# Altium PCB PMOD_RS485.PcbDoc
Units mil, origin at the board's own origin, x right, y up, seen from the top; angles counter-clockwise.
Board outline 1800 x 800 mil, 2 copper layers (Top Layer, Bottom Layer), stack 62.441 mil thick; 21 components, 10 nets, 57 pads, 7 vias.
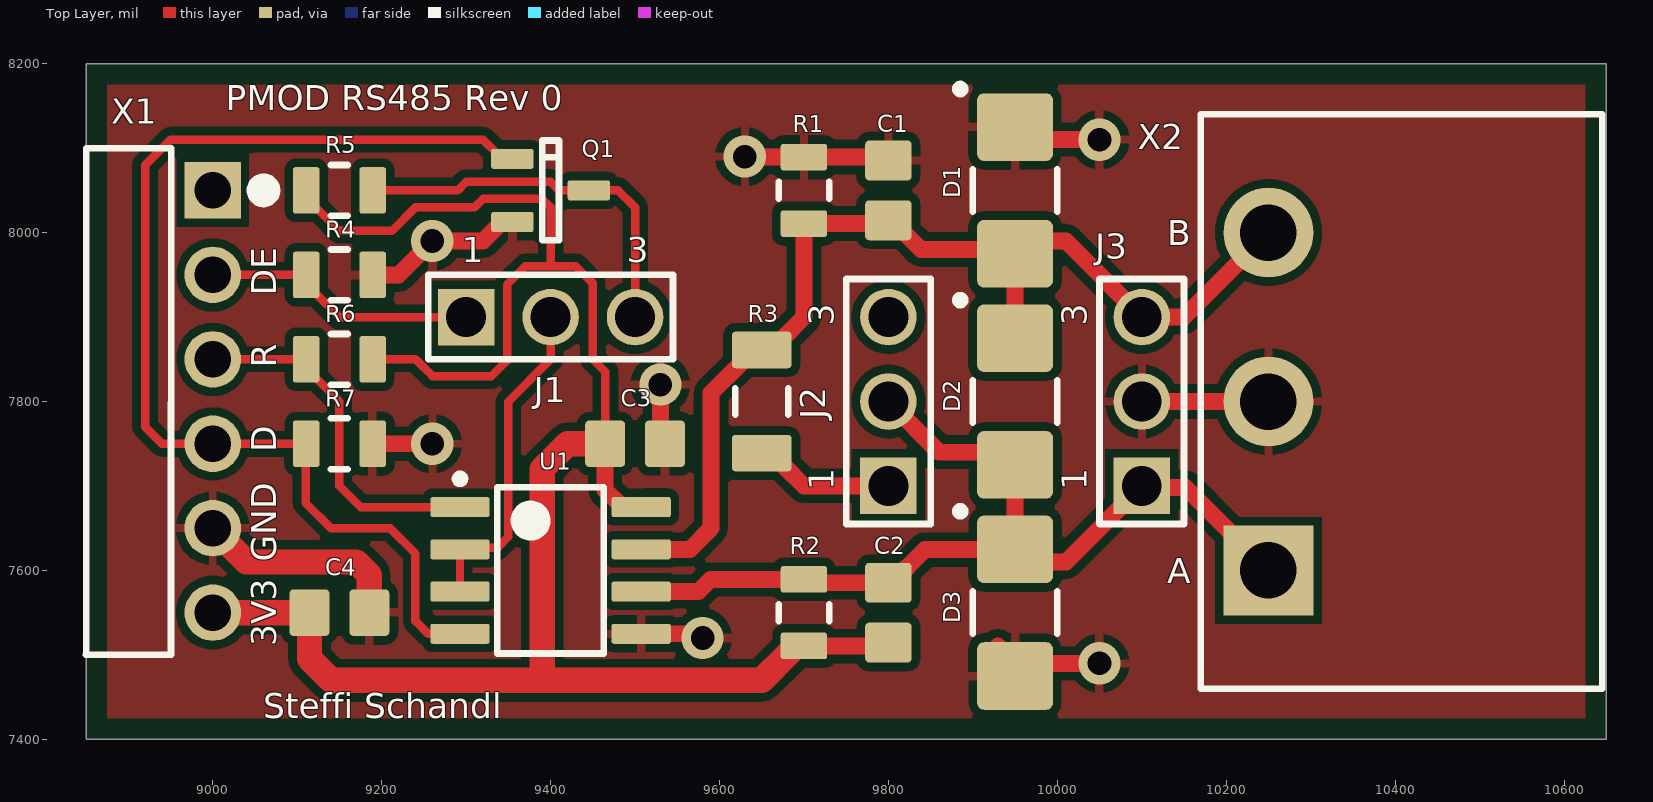
[diagram p0: Top Layer view]
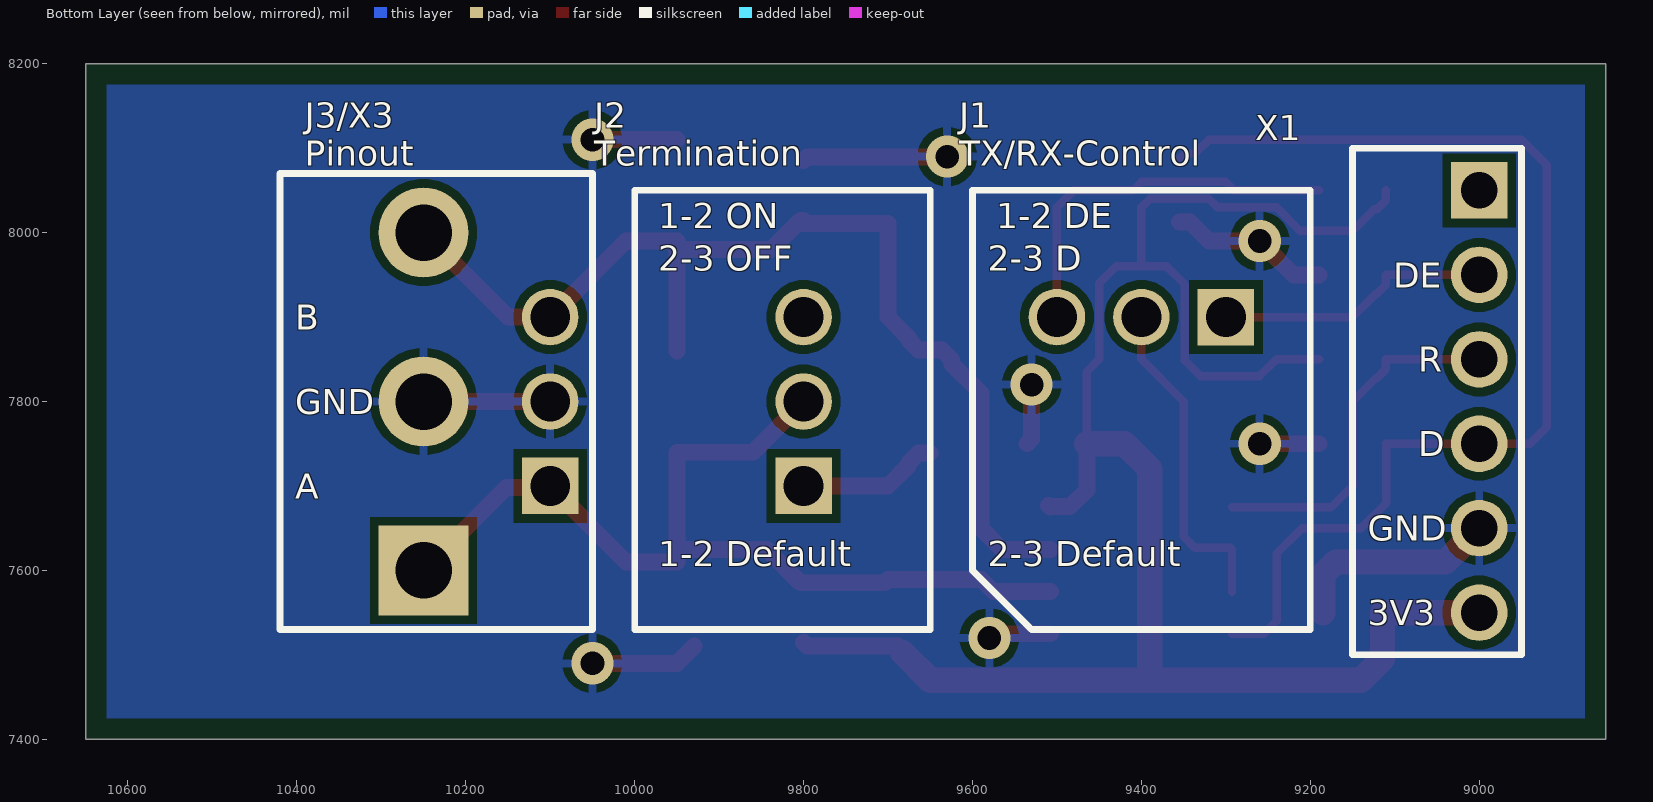
[diagram p1: Bottom Layer view, seen from below]

## Layer stack, top to bottom
Top Solder: solder mask 0.4, Solder Resist, Dk 3.5
Top Layer: signal copper 1.4173
Dielectric 1: dielectric 59.6063, FR-4, Dk 4.8
Bottom Layer: signal copper 1.4173
Bottom Solder: solder mask 0.4, Solder Resist, Dk 3.5

## Board outline
8850,7400 8850,8200 10650,8200 10650,7400

## Design rules (kind name [scope] priority, off if disabled: settings)
Clearance [All] p1: gap=10 ignorepadtopadclearanceinfootprint=FALSE except(0: Arc-Hole Track-Hole SMDPad-Hole THPad-Hole Via-Hole Fill-Hole Poly-Hole Region-Hole Text-Hole)
PolygonConnect [All] p1: connectstyle=Relief reliefconductorwidth=10 reliefentries=4 polygonreliefangle="90 Angle" airgapwidth=10
RoutingVias [All] p1: holewidth=28 width=50 viastyle="Through Hole" minholewidth=28 minwidth=50 maxholewidth=28 maxwidth=50
SilkToSilkClearance [All] p1: silktosilkclearance=2.5
SilkToSolderMaskClearance [IsPad] p1: minsilkscreentomaskgap=2.5 clearancetoexposedcopper=TRUE
SolderMaskExpansion [All] p1: expansion=4 istentingtop=FALSE
Width [All] p1: maxlimit=50 minlimit=10 preferedwidth=20
28 further rules are at their usual default settings.

## Components (designator, comment, footprint, x,y, rotation, side; value= is the part's Value field where it differs from the comment)
C1 "100p" 0805-C 9800,8050 r270 top
C2 "100p" 0805-C 9800,7550 r270 top
C3 "100n" 0805-C 9500,7750 r0 top
C4 "10u" 0805-C 9150,7550 r180 top
D1 "SMAJ12.0CA" SMA-BIDIRECTIONAL 9950,8050 r270 top
D2 "SMAJ6.5CA" SMA-BIDIRECTIONAL 9950,7800 r270 top
D3 "SMAJ12.0CA" SMA-BIDIRECTIONAL 9950,7550 r270 top
J1 "61300311121" WE-61300311121 10850,7900 r0 top
J2 "61300311121" WE-61300311121 9800,9250 r90 top
J3 "61300311121" WE-61300311121 10100,9250 r90 top
Q1 "BSS138" SOT23-3 9400,8050 r270 top
R1 "10K" 0805-R 9700,8050 r270 top
R2 "10K" 0805-R 9700,7550 r270 top
R3 "120R" 1206-R 9650,7800 r270 top
R4 "10K" 0805-R 9150,7950 r0 top
R5 "10K" 0805-R 9150,8050 r180 top
R6 "10K" 0805-R 9150,7850 r180 top
R7 "10K" 0805-R 9150,7750 r180 top
U1 "THVD1429" SOIC-8 9400,7600 r270 top
X1 "61300611021" WE-61302021121 9000,7800 r0 top
X2 "691313510003" WE-691313510003 10250,7800 r90 top

## Footprints (in the part's own frame and the unit in brackets; to place one, negate y for a bottom-side part, rotate by r counter-clockwise, add the part's x,y. Pads: shape width x height; smd on the part's side, far side on the other; paste and mask are expansions set on the pad)
0805-C [mm] "Chip Capacitor, 2-Leads, Body 2,00x1,25mm, IPC Medium Density"
  rrect20% 1.2x1.4 smd: 1(-0.9,0) 2(0.9,0)
  body extent -1.1,-0.72 1.1,0.72, height 1.45
0805-R [mm] "Chip Resistor, 2-Leads, Body 2,00x1,25mm, IPC Medium Density"
  rrect20% 0.8x1.4 smd: 1(-1,0) 2(1,0)
  silkscreen extent -0.25,-0.76 0.25,0.76, body extent -1,-0.62 1,0.63, height 0.5
1206-R [mm] "Chip Resistor, 2-Leads, Body 3,13x1,55mm, IPC Medium Density"
  rrect20% 1.1x1.8 smd: 1(-1.55,0) 2(1.55,0)
  silkscreen extent -0.4,-0.8 0.4,0.8, body extent -1.6,-0.8 1.6,0.8, height 0.6
SMA-BIDIRECTIONAL [mil] "Molded Diode DO-214AC (SMA), 2-Leads, Body 4.25x2.67mm, IPC Medium Density"
  rrect20% 80x90 smd: 1(-75,0) 2(75,0)
  silkscreen extent -125,-70 25,50, body extent -108,-55 108,55, height 102
SOIC-8 [mm] "SOIC, 8-Leads, Body 4,90x3,90mm, Pitch 1,27mm, IPC Medium Density"
  rrect20% 0.6x1.778 smd: 1(-1.905,-2.725) 2(-0.635,-2.725) 3(0.635,-2.725) 4(1.905,-2.725) 5(1.905,2.725) 6(0.635,2.725) 7(-0.635,2.725) 8(-1.905,2.725)
  silkscreen extent -2.88,-2.85 2.5,1.6, body extent -2.5,-3 2.5,3, height 1.75
SOT23-3 [mm] "SOT95P230X110-3N, JEDEC TO-236AB"
  rrect20% 0.6x1.27 smd: 1(-0.95,-1.15) 2(0.95,-1.15) 3(0,1.15)
  silkscreen extent -1.5,-0.25 1.5,0.25, body extent -1.45,-1.4 1.45,1.4, height 1.3
WE-61300311121 [mm] "CONN HEADER VERT 3POS 2.54MM"
  rect 1.7x1.7 hole 1.2: 1(-39.37,0)
  round 1.7 hole 1.2: 2(-36.83,0) 3(-34.29,0)
  silkscreen extent -40.51,-1.27 -33.15,1.27, body extent -40.64,-1.27 -33.02,1.27, height 8.54
WE-61302021121 [mm] "CONN HEADER VERT 20POS 2.54MM"
  rect 1.7x1.7 hole 1.1: 1(0,6.35)
  round 1.7 hole 1.1: 2(0,3.81) 3(0,1.27) 4(0,-1.27) 5(0,-3.81) 6(0,-6.35)
  silkscreen extent -3.82,-7.62 1.78,7.62, body extent -10.06,-7.62 0.3,7.62, height 2.54
WE-691313510003 [mm] "TERM BLOCK HDR 3POS 90DEG 5.08MM"
  rect 2.7x2.7 hole 1.7: 1(-5.08,0)
  round 2.7 hole 1.7: 2(0,0) 3(5.08,0)
  silkscreen extent -8.64,-10.03 8.64,2.03, body extent -8.62,-10.06 8.62,1.94, height 8.64

## Part data
C1 C2: library part "Capacitor 100p 0805", "CAP CER 100PF 250V C0G/NP0 0805", Manufacturer="Murata Electronics", Manufacturer PartNo=GRM21A5C2E101FW01D, Supplier 1 PartNo (Info)=490-GRM21A5C2E101FW01DCT-ND, Supplier 1 (Info)=Digi-Key
C3: library part "Capacitor 100n 0805", "CAP CER 0.1UF 50V X8R 0805", Manufacturer="Murata Electronics", Manufacturer PartNo=GCM21BR91H104KA37L, Supplier 1 PartNo (Info)=490-11165-1-ND, Supplier 1 (Info)=Digi-Key
C4: library part "Capacitor 10u 0805", "CAP CER 10UF 16V X5R 0805", Manufacturer="Taiyo Yuden", Manufacturer PartNo=EMK212BBJ106KGHT, Supplier 1 PartNo (Info)=587-3320-1-ND, Supplier 1 (Info)=Digi-Key
D1 D3: library part "Diode TVS SMAJ12.0CA", "TVS DIODE 12V 19.9V DO214AC", Manufacturer="Micro Commercial Co", Manufacturer PartNo=SMAJ12CA-TP, Supplier 1 PartNo (Info)=SMAJ12CA-TPMSCT-ND, Supplier 1 (Info)=Digi-Key
D2: library part "Diode TVS SMAJ6.5CA", "TVS DIODE 6.5V 11.2V DO214AC", Manufacturer="Micro Commercial Co", Manufacturer PartNo=SMAJ6.5CA-TP, Supplier 1 PartNo (Info)=SMAJ6.5CA-TPMSCT-ND, Supplier 1 (Info)=Digi-Key
J1 J2 J3: library part "WE 61300311121", "CONN HEADER VERT 3POS 2.54MM", Manufacturer="Würth Elektronik", Supplier 1 PartNo (Info)=732-5316-ND, Manufacturer PartNo=61300311121, Supplier 1 (Info)=Digi-Key
Q1: library part "Transistor MOSFET N Channel", "MOSFET N-CH 50V 200MA SOT-23", Manufacturer="ON Semiconductor", Manufacturer PartNo=BSS138LT3G, Supplier 1 PartNo (Info)=BSS138LT3GOSCT-ND, Supplier 1 (Info)=Digi-Key
R1 R2 R4 R5 R6 R7: library part "Resistor 10K 0805", "RES SMD 10K OHM 1% 1/8W 0805", Manufacturer=Yageo, Manufacturer PartNo=RC0805FR-0710KL, Supplier 1 PartNo (Info)=311-10.0KCRCT-ND, Supplier 1 (Info)=Digi-Key
R3: library part "Resistor 120R 1206", "RES SMD 120 OHM 1% 1/4W 1206", Manufacturer=Yageo, Manufacturer PartNo=RC1206FR-07120RL, Supplier 1 PartNo (Info)=311-120FRCT-ND, Supplier 1 (Info)=Digi-Key
U1: library part "THVD1429 SOIC8", "IC TRANSCEIVER HALF 1/1 8SOIC", Manufacturer="Texas Instruments", Manufacturer PartNo=THVD1429DR, Supplier 1 PartNo (Info)=296-THVD1429DRCT-ND, Supplier 1 (Info)=Digi-Key
X1: library part "PMOD Plug 6X1", "CONN HEADER R/A 6POS 2.54MM", Manufacturer="Würth Elektronik", Supplier 1 PartNo (Info)=732-5339-ND, Manufacturer PartNo=61300611021, Supplier 1 (Info)=Digi-Key
X2: library part "WE 691313510003", "TERM BLOCK HDR 3POS 90DEG 5.08MM", Manufacturer="Würth Elektronik", Supplier 1 PartNo (Info)=732-2071-ND, Manufacturer PartNo=691313510003, Supplier 1 (Info)=Digi-Key

## Via types
v1: diameter 50, hole 28, Top Layer to Bottom Layer, 7 vias

## Nets (pads, with @x,y where several pads share a name; then routed paths per layer and width w, separated by ;. In a path a pad name is that pad's centre, name@x,y a point inside that pad or via, vN(x,y) a via of type N, cw(c..) or ccw(c..) an arc to the next point about the centre after c; other vN are vias at no path point)
D: Q1.1 R7.2 U1.4 X1.4 | length 1329.5
  Top Layer w10: U1.4 9255,7525 9240,7540 9240,7620 9210,7650 9140,7650 9110,7680 9110,7749.37 R7.2 X1.4 8940,7750 8920,7770 8920,8080 8950,8110 9320,8110 9336.35,8093.65 9348.47,8093.65 Q1.1
DE: J1.1 R4.1 X1.2 | length 327.6
  Top Layer w10: X1.2 R4.1 9110.63,7938.19 9121.38,7927.44 9122.56,7927.44 9150,7900 J1.1
GND: C1.1 C3.2 C4.1 D1.1 D3.2 J3.2 Q1.2 R1.1 R4.2 R7.1 U1.5 X1.5 X2.2 | length 1213
  Top Layer w20: R7.1 v1(9260,7750) ; R4.2 9220,7950 v1(9260,7990) 9320,7990 9342.6,8012.6 Q1.2 ; U1.5 9575,7525 v1(9580,7520) ; v1(9530,7820) 9530,7755.43 C3.2 ; v1(9630,8090) 9630.63,8089.37 R1.1 9796.06,8089.37 C1.1 ; D3.2@9929.49,7510.63 9950,7490.12 9950,7489.96 v1(10050,7490) v1(10050,7490) ; D1.1@9950,8110.04 v1(10050,8110) v1(10050,8110) ; J3.2 X2.2
  Top Layer w30: X1.5 9040,7610 9170,7610 9185.43,7594.57 C4.1
NetC1_2: C1.2 D1.2 D2.1 J3.3 R1.2 R3.1 U1.7 X2.3 | length 1290.4
  Top Layer w20: U1.7 9565,7625 9590,7650 9590,7810 9624.57,7844.57 9624.57,7849.37 9636.22,7861.02 R3.1 9663.78,7861.02 9675.43,7872.68 9675.43,7875.43 9700,7900 R1.2 C1.2@9800,8010.63 ; C1.2 9803.94,8014.57 9838.5,7980 9945,7980 D1.2 ; D2.1@9950,7860.04 9950,7980 9950,7989.96 10010.04,7989.96 J3.3 10150,7900 X2.3
NetC2_1: C2.1 D2.2 D3.1 J2.2 J3.1 R2.1 U1.6 X2.1 | length 1150.2
  Top Layer w20: U1.6 9575,7575 9589.37,7589.37 R2.1 9703.94,7585.43 9803.94,7585.43 9843.5,7625 D3.1 ; J2.2 9860.04,7739.96 9950,7739.96 D3.1 ; X2.1 10151.75,7698.25 10101.75,7698.25 J3.1 10010.04,7610.04 9950,7610.04 D3.1
NetJ1_2: J1.2 U1.2 U1.3 | length 394.2
  Top Layer w10: U1.3 U1.2 9294.58,7626.86 9336.86,7626.86 9350,7640 9350,7800 9400,7850 J1.2
NetJ1_3: J1.3 Q1.3 R5.1 | length 457.2
  Top Layer w10: R5.1 9290,8050 9300,8060 9400,8060 9410,8050 Q1.3 9480,8050 9500,8030 J1.3
NetJ2_1: J2.1 R3.2 | length 167.8
  Top Layer w20: R3.2 9663.78,7738.98 9675.43,7727.32 9675.43,7724.57 9700,7700 J2.1
R: R6.2 U1.1 X1.3 | length 430.7
  Top Layer w10: X1.3 R6.2 9110.63,7838.19 9121.38,7827.44 9122.6,7827.44 9150,7800.04 9150,7700 9175,7675 U1.1
VCC: C2.2 C3.1 C4.2 R2.2 R5.2 R6.1 U1.8 X1.6 | length 2317
  Top Layer w10: R5.2 9110.63,8038.19 9121.38,8027.44 9124.56,8027.44 9150,8002 9212,8002 9240,8030 9310,8030 9320,8040 9390,8040 9400,8030 9400,7960 ; R6.1 9240,7850 9260,7830 9330,7830 9348.46,7848.46 9348.46,7938.46 9370,7960 9400,7960 ; C3.1 9464.57,7835.43 9450,7850 9450,7940 9430,7960 9400,7960
  Top Layer w20: C3.1 9464.57,7695.43 9484.31,7675.69 9506.59,7675.69 U1.8 9508.33,7675 U1.8@9510,7676.67 ; R2.2@9682.44,7502.44 9682.44,7504.88 9688.19,7510.63 R2.2 9796.06,7510.63 C2.2
  Top Layer w30: X1.6 C4.2 9114.57,7495.43 9140,7470 9390,7470 ; C3.1 9420,7750 9390,7720 9390,7470 ; R2.2@9682.44,7502.44 9650,7470 9390,7470
pads on no net: J2.3 X1.1

## Polygon pours and split planes (outlines as drawn)
GND on Bottom Layer "GND_L02_P-001" (solid, pour order 0): 8875,8175 10625,8175 10625,7425 8875,7425
GND on Top Layer "GND_L02_P-001" (solid, pour order 1): 8875,8175 10625,8175 10625,7425 8875,7425

## Silkscreen, mask and mechanical layers (free items; w line width, h text height)
Top Overlay:
  text "PMOD RS485 Rev 0" at 9015.08,8145 h30
  text "B" at 10130,7985 h30
  text "DE" at 9075,7925.01 h30 r90
  text "R" at 9075,7840 h30 r90
  text "D" at 9075,7740 h30 r90
  text "GND" at 9075,7610.01 h30 r90
  text "A" at 10130,7585 h30
  text "3V3" at 9075,7510.01 h30 r90
  text "Steffi Schandl" at 9060.06,7425 h30
Bottom Overlay:
  lines w7.87: 8950,7500 8950,8100 9150,8100 9150,7500 8950,7500 ; 9200,7530 9530,7530 9600,7600 9600,8050 9200,8050 9200,7530 ; 9650,7530 10000,7530 10000,8050 9650,8050 9650,7530 ; 10050,7530 10050,8070 10420,8070 10420,7530 10050,7530
  text "X1" at 9265.43,8109.41 h30
  text "J1 / TX/RX-Control" at 9615.43,8079.41 h30
  text "J2 / Termination" at 10047.93,8079.41 h30
  text "J3/X3 / Pinout" at 10390.45,8079.41 h30
  text "1-2 DE" at 9572,8005 h30
  text "1-2 ON" at 9972,8005 h30
  text "2-3 D" at 9582,7955 h30
  text "2-3 OFF" at 9972,7955 h30
  text "DE" at 9102,7935 h30
  text "B" at 10402,7885 h30
  text "R" at 9072,7835 h30
  text "GND" at 10402,7785 h30
  text "D" at 9072,7735 h30
  text "A" at 10402,7685 h30
  text "GND" at 9132,7635 h30
  text "2-3 Default" at 9582,7605 h30
  text "1-2 Default" at 9972,7605 h30
  text "3V3" at 9132,7535 h30
Board Shape:
  the board outline again, w10
A4 Sheet:
  lines w10: 4000,4000 15500,4000 15500,11603.94 4000,11603.94 4000,4000
Top A4 ISO Block:
  lines w10: 4000,5900 4200,5900 ; 4000,7800 4200,7800 ; 4000,9700 4200,9700 ; 4200,4500 9100,4500 ; 6875,4000 6875,4200 ; 6875,11400 6875,11600 ; 9100,4200 9100,5700 ; 9750,4000 9750,4200 ; 9750,11400 9750,11600 ; 10700,4200 10700,5700 ; 10700,4500 11700,4500 15300,4500 ; 10700,4800 15300,4800 ; 10700,5100 15300,5100 ; 10700,5400 11700,5400 ; 11700,4200 11700,5700 ; 12625,4000 12625,4200 ; 12625,11400 12625,11600 ; 13100,4500 13100,4800 ; 14500,4200 14500,4800 ; 14900,4200 14900,4800 ; 15300,5700 9100,5700 ; 15300,5900 15500,5900 ; 15300,7800 15500,7800 ; 15300,9700 15500,9700 ; 9100,5700 9100,5700 ; 4000,4000 15500,4000 15500,11600 4000,11600 4000,4000 ; 4200,4200 15300,4200 15300,11400 4200,11400 4200,4200
  text "3" at 11166.16,11431.4 h140
  text "1" at 5423.5,11430 h140
  text "2" at 8282.37,11430 h140
  text "4" at 14031.61,11430 h140
  text "A" at 4055.58,10580 h140
  text "A" at 15355.58,10580 h140
  text "B" at 4062.4,8680 h140
  text "B" at 15362.4,8680 h140
  text "C" at 4062.4,6781.87 h140
  text "C" at 15362.4,6781.87 h140
  text "Projekt" at 11725,5601.23 h110
  text "Gezeichnet von" at 10725,5591.25 h110
  text ".P_PcbDrawnBy" at 10800,5450.88 h160
  text "am" at 10725,5302.6 h110
  text ".P_ProjectName" at 11800,5291.25 h280
  text ".P_PcbDrawn" at 10800,5152.15 h160
  text "Freigegeben" at 10725,5001.23 h110
  text "Titel" at 11725,4991.2 h110
  text "D" at 4057.85,4880 h140
  text "D" at 15357.85,4880 h140
  text ".Layer_Name" at 11800,4865.28 h160
  text ".P_PcbCheckedBy" at 10800,4850.88 h160
  text "ibs" at 9273.46,4841.61 h1120
  text "am" at 10725,4702.6 h110
  text "Nummer" at 11725,4692.8 h110
  text "Variante" at 13125,4691.25 h110
  text "Revision" at 14525,4691.2 h110
  text "Größe" at 14925,4691.25 h110
  text ".P_PcbChecked" at 10800,4552.15 h160
  text ".P_PcbIndex" at 14600,4551.95 h160
  text ".VariationNane" at 11800,4550.88 h160
  text ".VariationNane" at 13200,4550.88 h160
  text "A4" at 15000,4551.08 h160
  text "Status" at 10725,4392.12 h110
  text "Datei" at 11725,4391.2 h110
  text "Blatt" at 14525,4390.97 h110
  text "Blätter" at 14925,4391.2 h110
  text "IBS-Systemtechnik / Wettersteinstrasse 14 / D-82481 Mittenwald" at 9298.46,4329.8 h140
  text ".DocumentName" at 11800,4253.15 h160
  text "1" at 14600,4251.15 h160
  text "1" at 15000,4251.15 h160
  text "Weitergabe, sowie Vervielfältigung dieser Unterlage, Verwertung und Mitteilung ihres Inhaltes nicht gestattet, soweit nicht ausdrücklich schriftlich zugestanden. Alle Rechte vorbehalten." at 4250,4250 h110
  text ".P_PcbStatus" at 10800,4240.41 h160
  text "3" at 11166.16,4031.4 h140
  text "1" at 5423.5,4030 h140
  text "2" at 8282.37,4030 h140
  text "4" at 14031.61,4030 h140
Bottom A4 ISO Block:
  lines w10: 4000,5900 4200,5900 ; 4000,7800 4200,7800 ; 4000,9700 4200,9700 ; 4200,4500 7800,4500 8800,4500 ; 4200,4800 8800,4800 ; 4200,5100 8800,5100 ; 4200,5700 10400,5700 ; 4600,4200 4600,4800 ; 5000,4200 5000,4800 ; 6400,4500 6400,4800 ; 6875,4000 6875,4200 ; 6875,11400 6875,11600 ; 7800,4200 7800,5700 ; 7800,5400 8800,5400 ; 8800,4200 8800,5700 ; 9750,4000 9750,4200 ; 9750,11400 9750,11600 ; 10400,4200 10400,5700 ; 10400,4500 15300,4500 ; 12625,4000 12625,4200 ; 12625,11400 12625,11600 ; 15300,5900 15500,5900 ; 15300,7800 15500,7800 ; 15300,9700 15500,9700 ; 10400,5700 10400,5700 ; 4000,4000 15500,4000 15500,11600 4000,11600 4000,4000 ; 4200,4200 15300,4200 15300,11400 4200,11400 4200,4200
  text "3" at 8333.84,11431.4 h140
  text "4" at 5468.39,11430 h140
  text "2" at 11217.63,11430 h140
  text "1" at 14076.5,11430 h140
  text "A" at 4144.42,10580 h140
  text "A" at 15444.42,10580 h140
  text "B" at 4137.6,8680 h140
  text "B" at 15437.6,8680 h140
  text "C" at 4137.6,6781.87 h140
  text "C" at 15437.6,6781.87 h140
  text "Projekt" at 7775,5601.23 h110
  text "Gezeichnet von" at 8775,5591.25 h110
  text ".P_PcbDrawnBy" at 8700,5450.88 h160
  text "am" at 8775,5302.6 h110
  text ".P_ProjectName" at 7700,5291.25 h280
  text ".P_PcbDrawn" at 8700,5152.15 h160
  text "Freigegeben" at 8775,5001.23 h110
  text "Titel" at 7775,4991.2 h110
  text "D" at 4142.15,4880 h140
  text "D" at 15442.15,4880 h140
  text ".Layer_Name" at 7700,4850.88 h160
  text ".P_PcbCheckedBy" at 8700,4850.88 h160
  text "ibs" at 10226.54,4841.61 h1120
  text "am" at 8775,4702.6 h110
  text "Nummer" at 7775,4692.8 h110
  text "Größe" at 4575,4691.25 h110
  text "Revision" at 4975,4691.2 h110
  text "Variante" at 6375,4691.25 h110
  text ".P_PcbIndex" at 4900,4551.95 h160
  text ".P_PcbChecked" at 8700,4552.15 h160
  text "A4" at 4500,4551.08 h160
  text ".VariationNane" at 6300,4550.88 h160
  text ".VariationNane" at 7700,4550.88 h160
  text "Status" at 8775,4392.12 h110
  text "Blätter" at 4575,4391.2 h110
  text "Blatt" at 4975,4390.97 h110
  text "Datei" at 7775,4391.2 h110
  text "IBS-Systemtechnik / Wettersteinstrasse 14 / D-82481 Mittenwald" at 10201.54,4329.8 h140
  text ".DocumentName" at 7700,4253.15 h160
  text "1" at 4500,4251.15 h160
  text "1" at 4900,4251.15 h160
  text "Weitergabe, sowie Vervielfältigung dieser Unterlage, Verwertung und Mitteilung ihres Inhaltes nicht gestattet, soweit nicht ausdrücklich schriftlich zugestanden. Alle Rechte vorbehalten." at 15250,4250 h110
  text ".P_PcbStatus" at 8700,4240.41 h160
  text "3" at 8333.84,4031.4 h140
  text "4" at 5468.39,4030 h140
  text "2" at 11217.63,4030 h140
  text "1" at 14076.5,4030 h140

## Text inside footprints (layer, text, board x,y; h text height)
J1: Top Overlay "1" at 9295,7965 h30; Top Overlay "3" at 9490,7965 h30
J2: Top Overlay "1" at 9735,7695 h30 r90; Top Overlay "3" at 9735,7890 h30 r90
J3: Top Overlay "3" at 10035,7890 h30 r90; Top Overlay "1" at 10035,7695 h30 r90